# Altium PCB SAU-G0-EX_TMPL.PcbDoc
Units mil, origin at the board's own origin, x right, y up, seen from the top; angles counter-clockwise.
Board outline 734.77 x 767.84 mil, 2 copper layers (Top Layer, Bottom Layer), stack 35.802 mil thick; 4 components, 8 nets, 8 pads, 0 vias.
Unrouted connection lines stored in the file: 3.
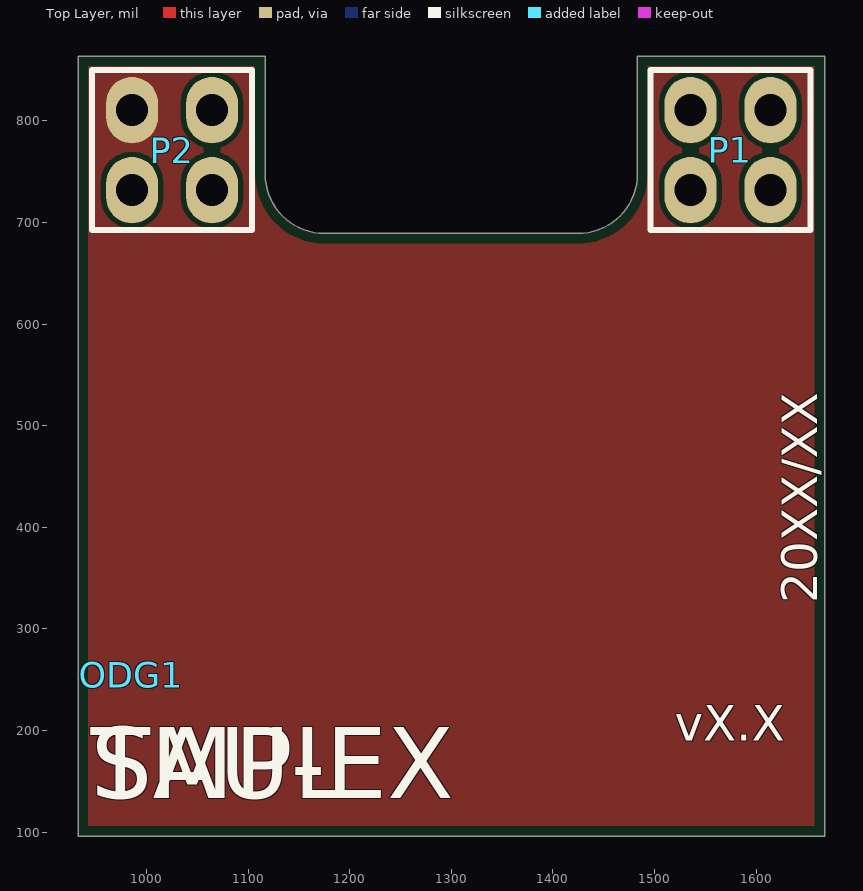
[diagram p0: Top Layer view]
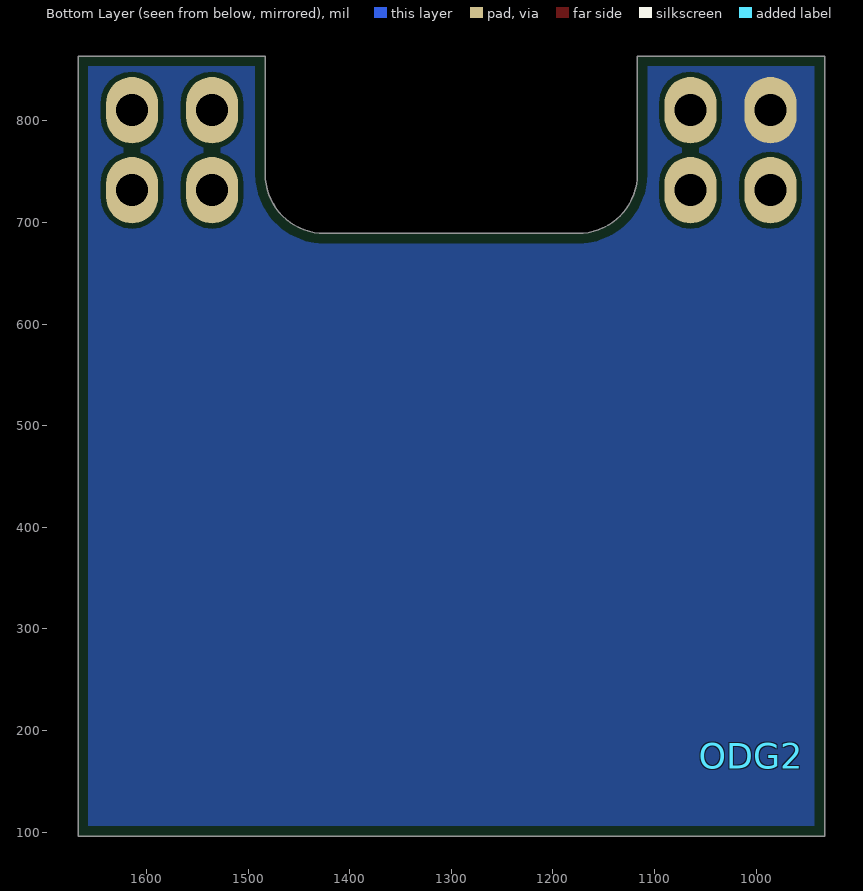
[diagram p1: Bottom Layer view, seen from below]

## Layer stack, top to bottom
Top Solder: solder mask 0.4, Solder Resist, Dk 3.5
Top Layer: signal copper 1.4
Dielectric 2: prepreg 2.8, PP-006, Dk 4.1
Dielectric 1: dielectric 27.4016, FR-4, Dk 4.8
Dielectric 3: prepreg 2.8, PP-006, Dk 4.1
Bottom Layer: signal copper 1.4
Bottom Solder: solder mask 0.4, Solder Resist, Dk 3.5

## Board outline
932.61,96 932.61,863.84 1116.78,863.84 1116.78,747.64 ccw(c1175.21,747.65) 1175.2,689.22 1424.8,689.22 ccw(c1424.79,747.65) 1483.22,747.64 1483.22,863.84 1667.39,863.84 1667.39,96

## Design rules (kind name [scope] priority, off if disabled: settings)
BoardOutlineClearance [All] p1: gap=10 ignorepadtopadclearanceinfootprint=FALSE except(0: Arc-SplitContinuation Track-SplitContinuation SMDPad-SplitContinuation THPad-SplitContinuation Via-SplitContinuation Fill-SplitContinuation Poly-SplitContinuation Region-SplitContinuation Text-SplitContinuation)
Clearance [All] p1: gap=5 ignorepadtopadclearanceinfootprint=FALSE except(0: Arc-Text Arc-Hole Track-Text Track-Hole SMDPad-Text SMDPad-Hole THPad-Text THPad-Hole Via-Text Via-Hole Fill-Text Fill-Hole Poly-Text Poly-Hole Region-Text Region-Hole Text-Text Text-Hole)
MinimumSolderMaskSliver [All] p1: minsoldermaskwidth=0
PlaneClearance [All] p1: clearance=10
PlaneConnect [All] p1: planeconnectstyle=Direct reliefexpansion=10 reliefentries=4 reliefconductorwidth=10 reliefairgap=10
PolygonConnect [All] p1: connectstyle=Direct reliefconductorwidth=10 reliefentries=4 polygonreliefangle="90 Angle" airgapwidth=10
RoutingVias [All] p1: holewidth=11.81 width=19.68 viastyle="Through Hole" minholewidth=11.81 minwidth=19.68 maxholewidth=196.85 maxwidth=196.85
SilkToSilkClearance [All] p1: silktosilkclearance=0
SilkToSolderMaskClearance [IsPad] p1: minsilkscreentomaskgap=0 clearancetoexposedcopper=TRUE
SolderMaskExpansion [All] p1: expansion=2
Width [All] p1: maxlimit=100 minlimit=5 preferedwidth=5
25 further rules are at their usual default settings.

## Components (designator, comment, footprint, x,y, rotation, side; value= is the part's Value field where it differs from the comment)
ODG1 "ODG_LOGO" ODG_LOGO_soldermask 985,255 r0 top
ODG2 "ODG_LOGO" ODG_LOGO_soldermask 1005,175 r180 bottom
P1 "Male" 2.0MM_MALE_2X2 1574.79,771.25 r0 top
P2 "Male" 2.0mm_Male_2x2 1025.18,771.25 r0 top

## Footprints (in the part's own frame and the unit in brackets; to place one, negate y for a bottom-side part, rotate by r counter-clockwise, add the part's x,y. Pads: shape width x height; smd on the part's side, far side on the other; paste and mask are expansions set on the pad)
2.0MM_MALE_2X2 [mm]
  oval 1.3x1.66 hole 0.8: 1(-1,1) 2(1,1) 3(-1,-1) 4(1,-1)
  silkscreen extent -2,-2 2,2, body extent -2,-2 2,2, height 5.7
2.0mm_Male_2x2 [mm]
  oval 1.3x1.66 hole 0.8: 1(-1,1) 2(1,1) 3(-1,-1) 4(1,-1)
  silkscreen extent -2,-2 2,2, body extent -2,-2 2,2, height 5.7
ODG_LOGO_soldermask [mil]

## Part data
P1 P2: library part CONN_2X2

## Nets (pads, with @x,y where several pads share a name; then routed paths per layer and width w, separated by ;. In a path a pad name is that pad's centre, name@x,y a point inside that pad or via, vN(x,y) a via of type N, cw(c..) or ccw(c..) an arc to the next point about the centre after c; other vN are vias at no path point)
3V3: P2.3
GND: P2.1
GPIO_ndef: P2.4
PB6/MISO2: P1.3
SCL1/SCK2: P1.4
SDA1/MOSI2: P1.2
SPI2_NSS: P1.1
VbatWeek: P2.2

## Polygon pours and split planes (outlines as drawn)
GND on Top Layer "vcc-2" (solid, remove dead copper, pour order 62): 1700,900 900,900 900,50 1700,50
GND on Bottom Layer "vcc-2" (solid, remove dead copper, pour order 64): 1700,900 900,900 900,50 1700,50

## Silkscreen, mask and mechanical layers (free items; w line width, h text height)
Top Overlay:
  text "20XX/XX" at 1660,325 h35 r90
  text "vX.X" at 1520,190 h35
  text "SAU-EX" at 945,110 h120
  text "TMPL" at 945,110 h120
Mechanical 1:
  the board outline again, w6
Mechanical 2:
  lines w6: 932.61,479.92 1667.39,479.92 ; 1300,96 1300,863.84